# Altium PCB LightBarrier.PcbDoc
Units mil, origin at the board's own origin, x right, y up, seen from the top; angles counter-clockwise.
Board outline 366.14 x 326.77 mil, 2 copper layers (Top Layer, Bottom Layer); 4 components, 3 nets, 11 pads, 0 vias.
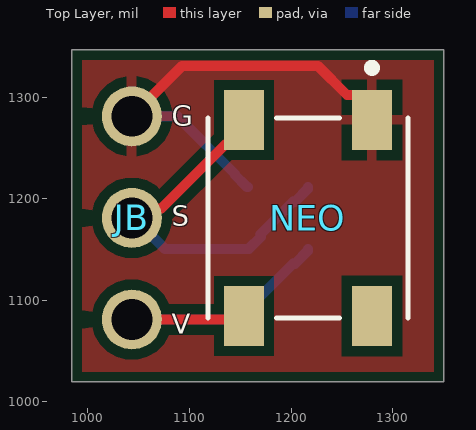
[diagram p0: Top Layer view]
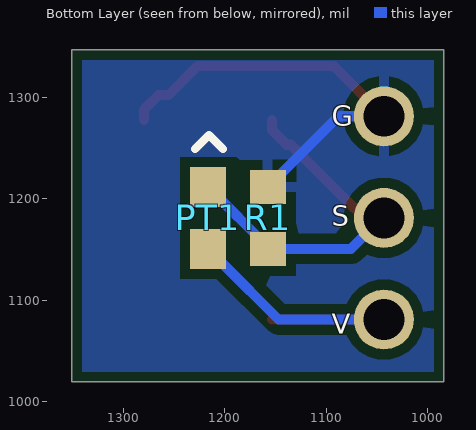
[diagram p1: Bottom Layer view, seen from below]

## Layer stack, top to bottom
Top Solder: solder mask 0.4, Solder Resist, Dk 3.5
Top Layer: signal copper 1.4
Dielectric 1: dielectric 12.6, FR-4, Dk 4.8
Bottom Layer: signal copper 1.4
Bottom Solder: solder mask 0.4, Solder Resist, Dk 3.5

## Board outline
984.25,1019.68 984.25,1346.46 1350.39,1346.46 1350.39,1019.68

## Design rules (kind name [scope] priority, off if disabled: settings)
BoardOutlineClearance [All] p1: gap=10 ignorepadtopadclearanceinfootprint=FALSE except(0: Arc-SplitContinuation Track-SplitContinuation SMDPad-SplitContinuation THPad-SplitContinuation Via-SplitContinuation Fill-SplitContinuation Poly-SplitContinuation Region-SplitContinuation Text-SplitContinuation)
Clearance [All] p1: gap=10 ignorepadtopadclearanceinfootprint=FALSE
PolygonConnect [All] p1: connectstyle=Relief reliefconductorwidth=10 reliefentries=4 polygonreliefangle="90 Angle" airgapwidth=10
RoutingVias [All] p1: holewidth=28 width=50 viastyle="Through Hole" minholewidth=28 minwidth=50 maxholewidth=28 maxwidth=50
SolderMaskExpansion [All] p1: expansion=4 istentingtop=FALSE
SupplyNets "Schematic Supply Nets_1" [InNet('GND')] p1: voltage=0.000
SupplyNets "Schematic Supply Nets" [InNet('+3V')] p2: voltage=0.000
Width [All] p1: maxlimit=10 minlimit=10 preferedwidth=10
30 further rules are at their usual default settings.

## Components (designator, comment, footprint, x,y, rotation, side; value= is the part's Value field where it differs from the comment)
JB "3PIN" 3PIN 1043.31,1181.1 r90 top
NEO "NEOPIXEL-5050" NEOPIXEL-5050 1216.54,1181.1 r90 top
PT1 "ALS-PT19" ALS-PT19 1216.54,1181.1 r90 bottom
R1 "10KΩ" RES_0603 1157.48,1181.1 r270 bottom

## Footprints (in the part's own frame and the unit in brackets; to place one, negate y for a bottom-side part, rotate by r counter-clockwise, add the part's x,y. Pads: shape width x height; smd on the part's side, far side on the other; paste and mask are expansions set on the pad)
3PIN [mm]
  round 1.5 hole 1.02: 1(-2.54,0) 2(0,0) 3(2.54,0)
ALS-PT19 [mm]
  rect 1x0.9 smd: C(-0.775,0) E(0.775,0)
  silkscreen extent 1.72,-0.38 2.07,0.32, body extent -0.85,-0.41 0.85,0.39, height 0.6
NEOPIXEL-5050 [mm]
  rect 1.5x1 smd: 1(2.45,-1.6) 2(2.45,1.6) 3(-2.45,1.6) 4(-2.45,-1.6)
  silkscreen extent -2.5,-2.5 3.85,2.5, body extent -2.7,-2.49 2.7,2.51, height 1.5
RES_0603 [mm] "Chip Resistor, 2-Leads, Body 1.60x0.80mm, IPC Medium Density"
  rect 0.85x0.9 smd: 1(-0.775,0) 2(0.775,0)
  body extent -0.85,-0.45 0.85,0.45, height 0.55

## Part data
JB: "2.54 Header"
R1: library part RES_0603, "Resistor SMD 0603 generic"

## Nets (pads, with @x,y where several pads share a name; then routed paths per layer and width w, separated by ;. In a path a pad name is that pad's centre, name@x,y a point inside that pad or via, vN(x,y) a via of type N, cw(c..) or ccw(c..) an arc to the next point about the centre after c; other vN are vias at no path point)
+3V: JB.1 NEO.3 PT1.C | length 313.4
  Top Layer w10: JB.1 NEO.3@1153.54,1081.1
  Bottom Layer w10: JB.1 1147.05,1081.1 1201.85,1135.91 1203.82,1135.91 1216.54,1148.62 PT1.C
GND: JB.3 NEO.1 R1.1 | length 428.1
  Top Layer w10: JB.3 1092.91,1330.71 1226.38,1330.71 1255,1302.09 1264.84,1302.09 1279.53,1287.4 NEO.1
  Bottom Layer w10: JB.3 1087.99,1281.1 1144.76,1224.33 1144.76,1223.35 1156.5,1211.61 R1.1
OUT: JB.2 NEO.2 PT1.E R1.2 | length 353.1
  Top Layer w10: JB.2@1062.99,1181.1 1062.99,1187.51 1065.97,1190.49 1072.38,1190.49 1134.92,1253.03 1138.86,1253.03 1153.54,1267.72 NEO.2
  Bottom Layer w10: JB.2 1045.25,1181.1 1075.77,1150.59 R1.2 ; R1.2@1158.46,1150.59 1170.2,1162.32 1170.2,1165.28 1201.85,1196.93 1203.82,1196.93 1216.54,1209.65 PT1.E
pads on no net: NEO.4

## Polygon pours and split planes (outlines as drawn)
GND on Bottom Layer "GND_L02_P001" (solid, pour order 1): 984.25,1346.46 984.25,1019.68 1350.39,1019.68 1350.39,1346.46
GND on Top Layer "GND_L01_P000" (solid, pour order 0): 984.25,1346.46 984.25,1019.68 1350.39,1019.68 1350.39,1346.46

## Silkscreen, mask and mechanical layers (free items; w line width, h text height)
Top Overlay:
  text "G" at 1082.68,1271.65 h19.68
  text "S" at 1082.68,1173.23 h19.68
  text "V" at 1082.68,1066.93 h19.68
Bottom Overlay:
  text "G" at 1094.49,1271.65 h19.68
  text "S" at 1094.49,1173.23 h19.68
  text "V" at 1094.49,1066.93 h19.68